# Altium PCB PCB1.pcbdoc
Units mil, origin at the board's own origin, x right, y up, seen from the top; angles counter-clockwise.
Board outline 5595 x 3600 mil, 2 copper layers (Top Layer, Bottom Layer); 17 components, 34 nets, 150 pads, 0 vias.
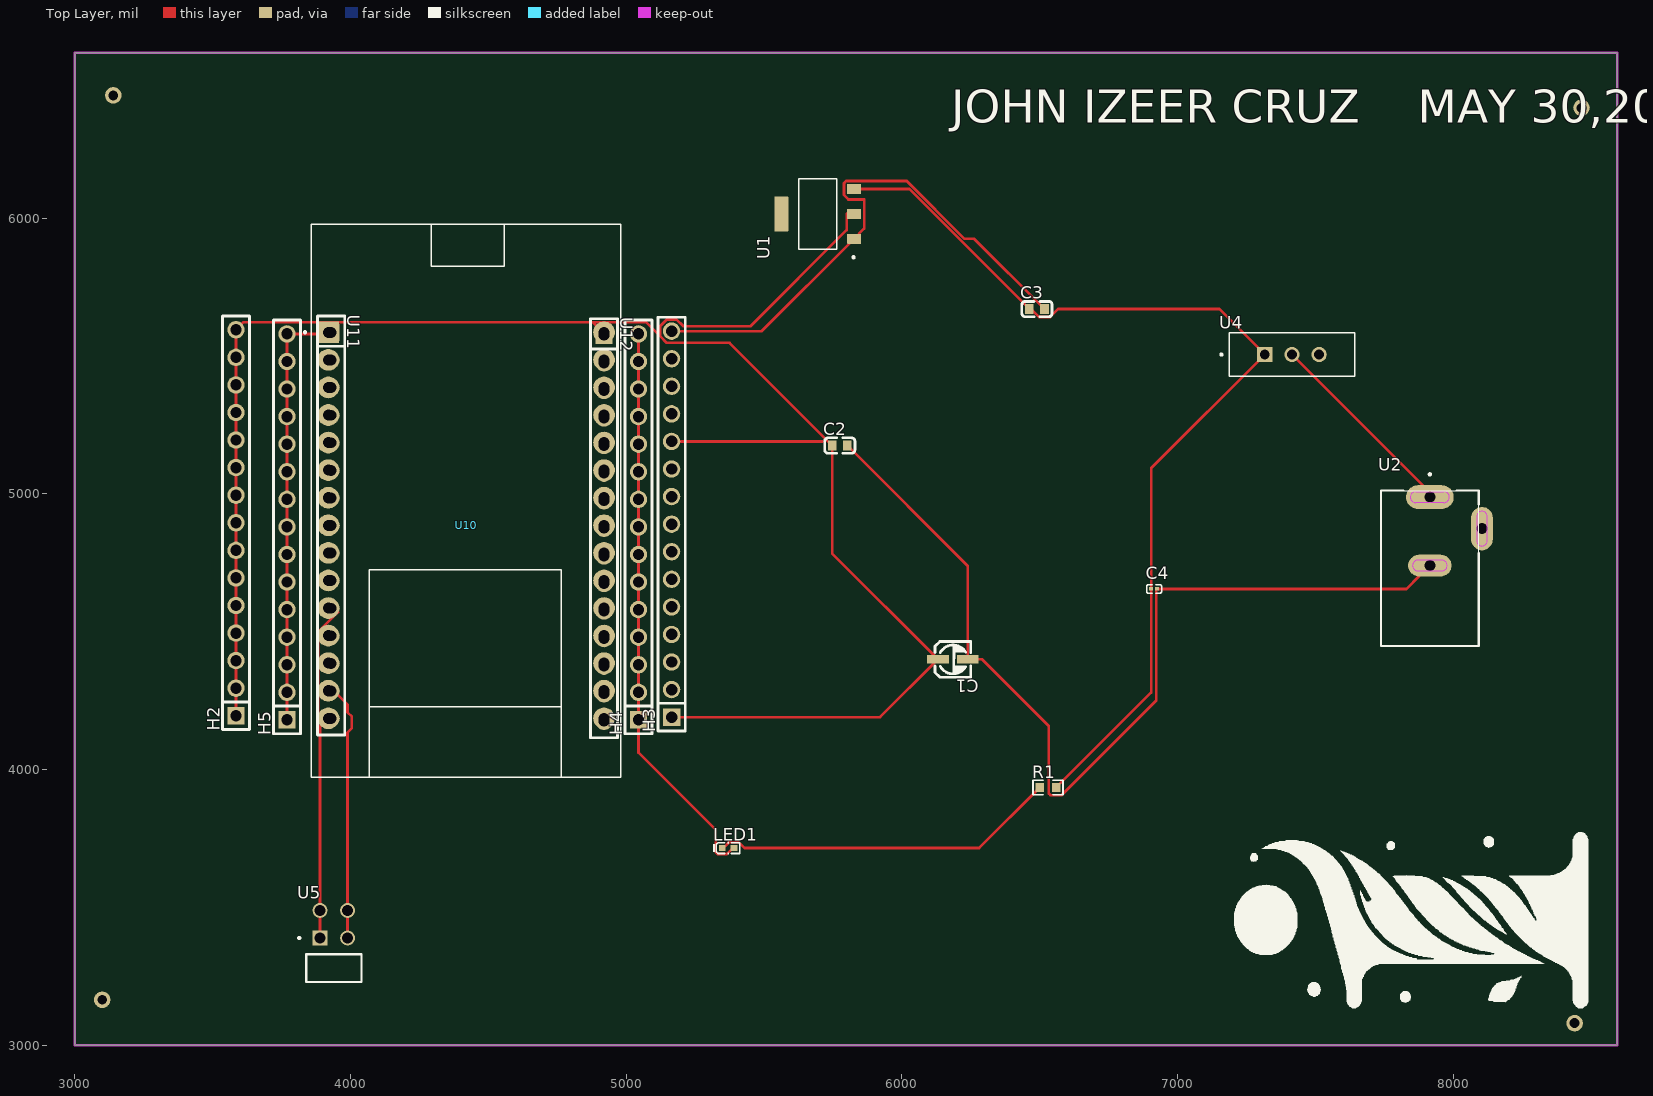
[diagram p0: Top Layer view]
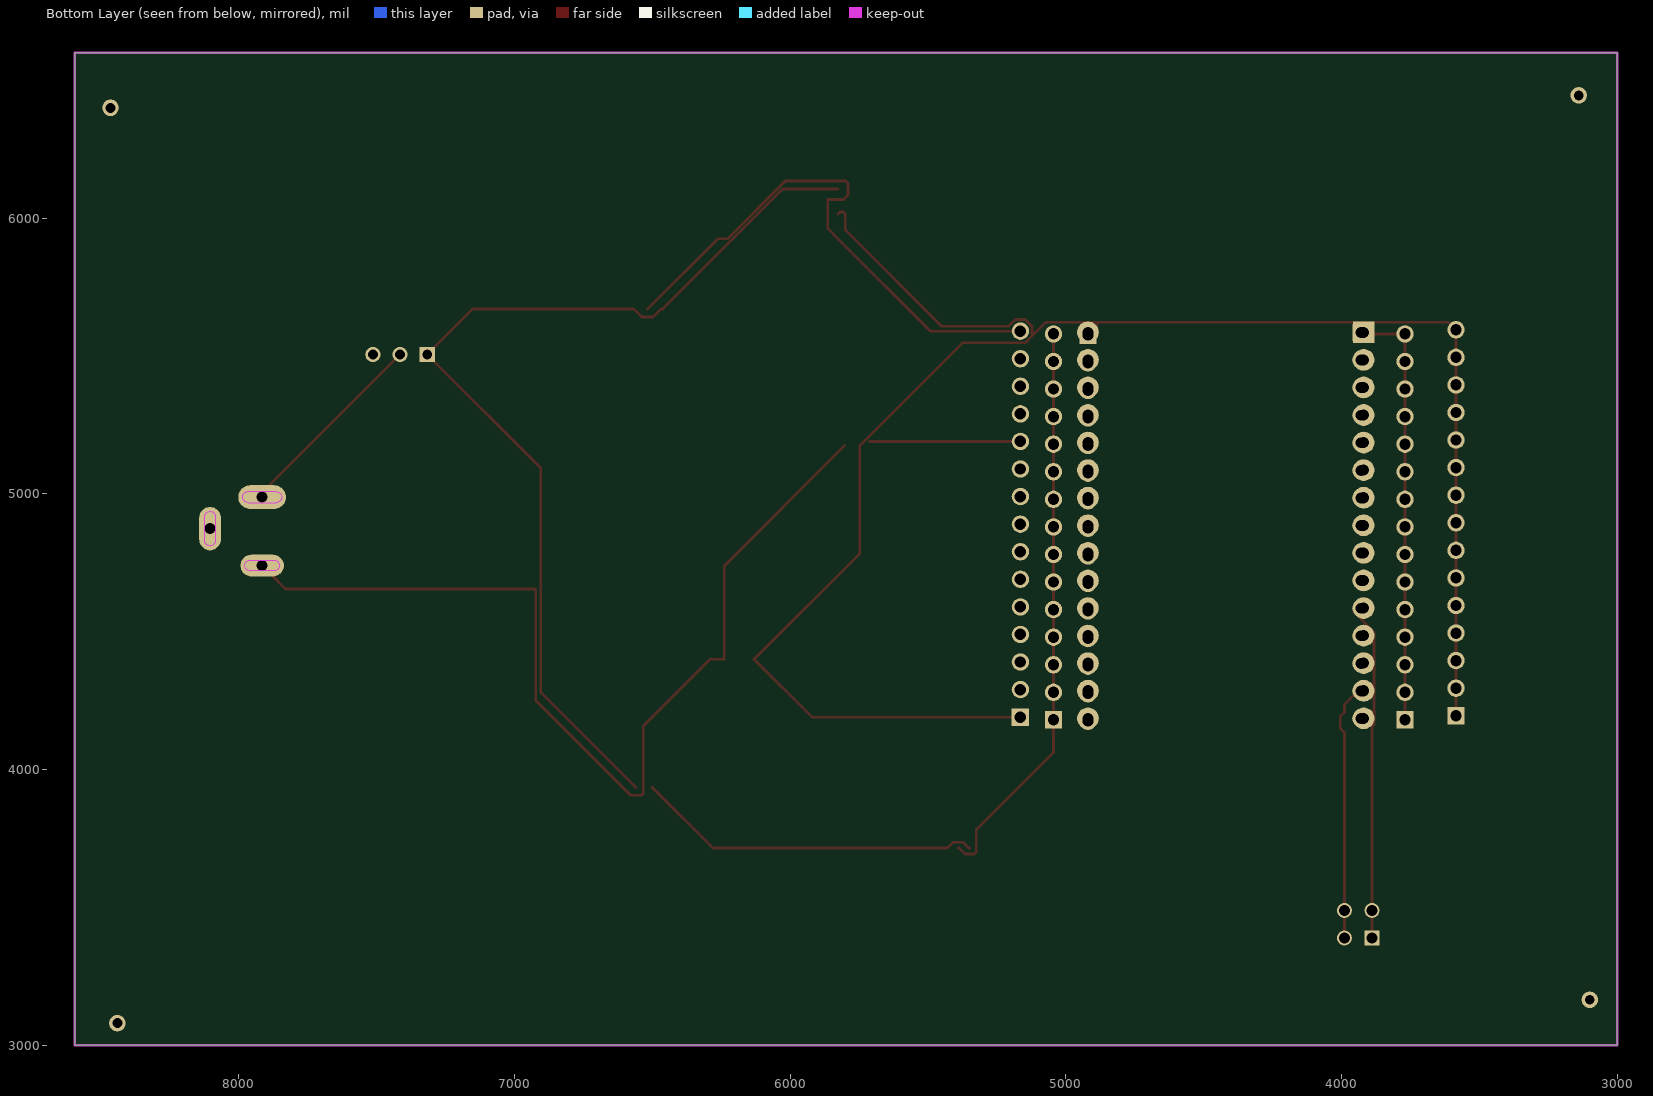
[diagram p1: Bottom Layer view, seen from below]

## Layer stack, top to bottom
Top Layer: signal copper (thickness not stored)
Dielectric: dielectric 12.6, FR-4, Dk 4.8
Bottom Layer: signal copper (thickness not stored)

## Board outline
3000,6600 8595,6600 8595,3000 3000,3000

## Design rules (kind name [scope] priority, off if disabled: settings)
BoardOutlineClearance copperThickness1oz [All] p0: genericclearance=10 ignorepadtopadclearanceinfootprint=FALSE except(0: Arc-SplitContinuation Track-SplitContinuation SMDPad-SplitContinuation THPad-SplitContinuation Via-SplitContinuation Fill-SplitContinuation Poly-SplitContinuation Region-SplitContinuation Text-SplitContinuation; 6: Track-CutoutEdge SMDPad-CutoutEdge THPad-CutoutEdge Via-CutoutEdge Region-CutoutEdge; 11.8: Track-OutlineEdge SMDPad-OutlineEdge THPad-OutlineEdge Via-OutlineEdge Fill-OutlineEdge Region-OutlineEdge Poly-OutlineEdge Text-OutlineEdge Fill-CutoutEdge)
BoardOutlineClearance copperThickness2oz [All] p0: genericclearance=10 ignorepadtopadclearanceinfootprint=FALSE except(0: Arc-SplitContinuation Track-SplitContinuation SMDPad-SplitContinuation THPad-SplitContinuation Via-SplitContinuation Fill-SplitContinuation Poly-SplitContinuation Region-SplitContinuation Text-SplitContinuation; 6: Track-CutoutEdge SMDPad-CutoutEdge THPad-CutoutEdge Via-CutoutEdge Region-CutoutEdge; 11.8: Track-OutlineEdge SMDPad-OutlineEdge THPad-OutlineEdge Via-OutlineEdge Fill-OutlineEdge Region-OutlineEdge Poly-OutlineEdge Text-OutlineEdge Fill-CutoutEdge)
Clearance copperThickness1oz [(InNet('+5V') OR InNet('GND') OR InNet('VCC') OR InNet('+3V3') OR InNet('$1N842') OR InNet('$1N851') OR InNet('D21') OR InNet('D22') OR InNet('3V3') OR InNet('D15') OR InNet('D2') OR InNet('D4') OR InNet('RX2') OR InNet('TX2') OR InNet('D5') OR InNet('D18') OR InNet('D19') OR InNet('RX0') OR InNet('TX0') OR InNet('D23') OR InNet('VIN') OR InNet('D13') OR InNet('D12') OR InNet('D14') OR InNet('D27') OR InNet('D26') OR InNet('D25') OR InNet('D33') OR InNet('D32') OR InNet('D35') OR InNet('D34') OR InNet('VN') OR InNet('VP') OR InNet('EN'))] p1: gap=7 ignorepadtopadclearanceinfootprint=FALSE except(4: Track-Track; 6: Track-SMDPad SMDPad-SMDPad Track-THPad SMDPad-THPad THPad-THPad Track-Via SMDPad-Via THPad-Via Via-Via SMDPad-Fill THPad-Fill Via-Fill Fill-Fill Track-Region SMDPad-Region THPad-Region Via-Region Region-Region Track-Poly SMDPad-Poly THPad-Poly Via-Poly Fill-Poly Region-Poly Poly-Poly Track-Text SMDPad-Text THPad-Text Via-Text Fill-Text Region-Text Poly-Text Text-Text; 6.9: Track-Hole SMDPad-Hole THPad-Hole Via-Hole Fill-Hole Region-Hole Poly-Hole Text-Hole Sheet-Hole; 11.8: Track-Fill Fill-Region Track-Sheet SMDPad-Sheet THPad-Sheet Via-Sheet Fill-Sheet Region-Sheet Poly-Sheet Text-Sheet)
Clearance copperThickness2oz [All] p1: gap=7 ignorepadtopadclearanceinfootprint=FALSE except(6: Track-SMDPad SMDPad-SMDPad Track-THPad SMDPad-THPad THPad-THPad Track-Via SMDPad-Via THPad-Via Via-Via SMDPad-Fill THPad-Fill Via-Fill Fill-Fill Track-Region SMDPad-Region THPad-Region Via-Region Region-Region Track-Poly SMDPad-Poly THPad-Poly Via-Poly Fill-Poly Region-Poly Poly-Poly Track-Text SMDPad-Text THPad-Text Via-Text Fill-Text Region-Text Poly-Text Text-Text; 6.9: Track-Hole SMDPad-Hole THPad-Hole Via-Hole Fill-Hole Region-Hole Poly-Hole Text-Hole Sheet-Hole; 8: Track-Track; 11.8: Track-Fill Fill-Region Track-Sheet SMDPad-Sheet THPad-Sheet Via-Sheet Fill-Sheet Region-Sheet Poly-Sheet Text-Sheet)
DiffPairsRouting differentialPair [All] p1: maxuncoupledlength=10 minlimit=6 maxlimit=6 mostfreqgap=6 toplayer_minwidth=5 toplayer_prefwidth=10 toplayer_maxwidth=100 bottomlayer_minwidth=5 bottomlayer_prefwidth=10 bottomlayer_maxwidth=100
PasteMaskExpansion pasteMaskExpansion [All] p1: expansion=0
PlaneConnect innerPlane [All] p1: planeconnectstyle=Relief reliefexpansion=20 reliefentries=4 reliefconductorwidth=10 reliefairgap=10
PolygonConnect copperRegion [All] p1: connectstyle=Relief reliefentries=4 reliefconductorwidth=10 polygonreliefangle="90 Angle" airgapwidth=10
RoutingVias viaSize [All] p1: viastyle="Through Hole" holewidth=12.0078 minholewidth=11.811 maxholewidth=248.0314 width=24.0158 minwidth=19.685 maxwidth=393.7008
SolderMaskExpansion solderMaskExpansion [All] p1: useseparateexpansions=TRUE expansion=2 expansionbottom=2
Width copperThickness1oz [All] p1: maxlimit=100 minlimit=5 preferedwidth=10
Width copperThickness2oz [All] p1: maxlimit=100 minlimit=8 preferedwidth=10

## Components (designator, comment, footprint, x,y, rotation, side; value= is the part's Value field where it differs from the comment)
C1 "C_Ele_SMD_3x5.4mm" CAP-SMD_BD3.0-L3.3-W3.3-RD 6185,4400 r180 top
C2 "CAP_0603" C0603 5775,5175 r0 top
C3 "CAP_0603" C0603 6490,5670 r0 top
C4 "CAP_0201" C0201 6915,4655 r0 top
H2 "2011-1X15G00SB" HDR-TH_15P-P2.54-V-M 3585,4895 r90 top
H3 "2011-1X15G00SB" HDR-TH_15P-P2.54-V-M 5165,4890 r90 top
H4 "2011-1X15G00SB" HDR-TH_15P-P2.54-V-M 5045,4880 r90 top
H5 "2011-1X15G00SB" HDR-TH_15P-P2.54-V-M 3770,4880 r90 top
LED1 "LED_0402-R" LED0402-RD_YELLOW 5370,3715 r0 top
R1 "Res_0603" R0603 6530,3935 r0 top
U1 "AMS1117-5.0" SOT229P700X180-4N 5695,6015 r90 top
U2 "DCJ200-10-A-XX-K_REVA" GCT_DCJ200-10-A-XX-K_REVA 7915,4730 r0 top
U4 "MINI-SPDT-SW" SW_MINI-SPDT-SW 7415,5505 r0 top
U5 "MTSW-102-10-L-D-472-RA" SAMTEC_MTSW-102-10-L-D-472-RA 3940,3280 r0 top
U10 "ESP32-DEVKIT-V1" MODULE_ESP32_DEVKIT_V1 4420,4975 r0 top
U11 "HX PM2.54-1x15P ZC" HDR-TH_15P-P2.54-V-F-1 3930,4885 r270 top
U12 "HX PM2.54-1x15P ZC" HDR-TH_15P-P2.54-V-F-1 4920,4875 r270 top

## Footprints (in the part's own frame and the unit in brackets; to place one, negate y for a bottom-side part, rotate by r counter-clockwise, add the part's x,y. Pads: shape width x height; smd on the part's side, far side on the other; paste and mask are expansions set on the pad)
C0201 [mil]
  rect 14.51x12.76 smd: 1(-10.8,0) 2(10.8,0)
  silkscreen extent -27,-15 27,15
C0603 [mm]
  rect 0.8x0.9 smd: 1(-0.7,0) 2(0.7,0)
  silkscreen extent -1.39,-0.71 1.39,0.71
CAP-SMD_BD3.0-L3.3-W3.3-RD [mm]
  rect 2x0.8 smd: 1(1.37,0) 2(-1.37,0)
  silkscreen extent -1.65,-1.64 1.65,1.66
GCT_DCJ200-10-A-XX-K_REVA [mm]
  oval 4.4x2.2 hole 1: 1(0,6.55)
  oval 4x2 hole 1: 2(0,0.25)
  oval 2x4 hole 1: 3(4.8,3.65)
  Board Outline Layer lines w0.003: -1.8,6.55 cw(c-1.3,6.55) -1.3,7.05 ; -1.8,6.55 cw(c-1.3,6.55) -1.3,7.05 ; -1.8,6.55 ccw(c-1.3,6.55) -1.3,6.05 ; -1.8,6.55 ccw(c-1.3,6.55) -1.3,6.05 ; -1.6,0.25 cw(c-1.1,0.25) -1.1,0.75 ; -1.6,0.25 cw(c-1.1,0.25) -1.1,0.75 ; -1.6,0.25 ccw(c-1.1,0.25) -1.1,-0.25 ; -1.6,0.25 ccw(c-1.1,0.25) -1.1,-0.25 ; -1.3,6.05 1.3,6.05 ; -1.3,6.05 1.3,6.05 ; -1.3,7.05 1.3,7.05 ; -1.3,7.05 1.3,7.05 ; -1.1,-0.25 1.1,-0.25 ; -1.1,-0.25 1.1,-0.25 ; -1.1,0.75 1.1,0.75 ; -1.1,0.75 1.1,0.75 ; 1.1,-0.25 ccw(c1.1,0.25) 1.6,0.25 ; 1.1,-0.25 ccw(c1.1,0.25) 1.6,0.25 ; 1.1,0.75 cw(c1.1,0.25) 1.6,0.25 ; 1.1,0.75 cw(c1.1,0.25) 1.6,0.25 ; 1.3,6.05 ccw(c1.3,6.55) 1.8,6.55 ; 1.3,6.05 ccw(c1.3,6.55) 1.8,6.55 ; 1.3,7.05 cw(c1.3,6.55) 1.8,6.55 ; 1.3,7.05 cw(c1.3,6.55) 1.8,6.55 ; 4.3,2.55 ccw(c4.8,2.55) 4.8,2.05 ; 4.3,2.55 ccw(c4.8,2.55) 4.8,2.05 ; 4.3,2.55 4.3,4.75 ; 4.3,2.55 4.3,4.75 ; 4.3,4.75 cw(c4.8,4.75) 4.8,5.25 ; 4.3,4.75 cw(c4.8,4.75) 4.8,5.25 ; 4.8,2.05 ccw(c4.8,2.55) 5.3,2.55 ; 4.8,2.05 ccw(c4.8,2.55) 5.3,2.55 ; 4.8,5.25 cw(c4.8,4.75) 5.3,4.75 ; 4.8,5.25 cw(c4.8,4.75) 5.3,4.75 ; 5.3,2.55 5.3,4.75 ; 5.3,2.55 5.3,4.75
  silkscreen extent -4.5,-7.15 4.5,8.75
HDR-TH_15P-P2.54-V-F-1 [mm]
  rect 1.6x1.575 hole 1: 1(-17.78,0)
  round 1.6 hole 1: 2(-15.24,0) 3(-12.7,0) 4(-10.16,0) 5(-7.62,0) 6(-5.08,0) 7(-2.54,0) 8(0,0) 9(2.54,0) 10(5.08,0) 11(7.62,0) 12(10.16,0) 13(12.7,0) 14(15.24,0) 15(17.78,0)
  silkscreen extent -19.3,-1.25 19.3,1.25
HDR-TH_15P-P2.54-V-M [mm]
  rect 1.6x1.6 hole 1.05: 1(-17.78,0)
  round 1.6 hole 1.05: 2(-15.24,0) 3(-12.7,0) 4(-10.16,0) 5(-7.62,0) 6(-5.08,0) 7(-2.54,0) 8(0,0) 9(2.54,0) 10(5.08,0) 11(7.62,0) 12(10.16,0) 13(12.7,0) 14(15.24,0) 15(17.78,0)
  silkscreen extent -19.05,-1.25 19.05,1.25
LED0402-RD_YELLOW [mm]
  rect 0.636x0.54 smd: 1(-0.538,0) 2(0.538,0)
  silkscreen extent -1.39,-0.54 1.09,0.54
MODULE_ESP32_DEVKIT_V1 [mm]
  rect 2x2 hole 1.02: 1(-12.7,15.515)
  round 2 hole 1.02: 2(-12.7,12.975) 3(-12.7,10.435) 4(-12.7,7.895) 5(-12.7,5.355) 6(-12.7,2.815) 7(-12.7,0.275) 8(-12.7,-2.265) 9(-12.7,-4.805) 10(-12.7,-7.345) 11(-12.7,-9.885) 12(-12.7,-12.425) 13(-12.7,-14.965) 14(-12.7,-17.505) 15(-12.7,-20.045) 16(12.7,-20.045) 17(12.7,-17.505) 18(12.7,-14.965) 19(12.7,-12.425) 20(12.7,-9.885) 21(12.7,-7.345) 22(12.7,-4.805) 23(12.7,-2.265) 24(12.7,0.275) 25(12.7,2.815) 26(12.7,5.355) 27(12.7,7.895) 28(12.7,10.435) 29(12.7,12.975) 30(12.7,15.515)
  silkscreen extent -14.95,-25.48 14.23,25.48
R0603 [mil]
  rect 31.75x34.02 smd: 1(-29.66,0) 2(29.66,0)
  silkscreen extent -55,-26 55,26
SAMTEC_MTSW-102-10-L-D-472-RA [mm]
  rect 1.37x1.37 hole 1.02: 01(-1.27,2.77)
  round 1.37 hole 1.02: 02(-1.27,5.31) 03(1.27,2.77) 04(1.27,5.31)
  silkscreen extent -3.29,-1.27 2.54,2.87
SOT229P700X180-4N [mm]
  rrect15% 0.93x1.31 smd: 1(-2.29,-3.345) 2(0,-3.345) 3(2.29,-3.345)
  rrect15% 3.24x1.31 smd: 4(0,3.345)
  silkscreen extent -4.09,-3.4 3.25,1.75
SW_MINI-SPDT-SW [mm]
  rect 1.408x1.408 hole 0.9: 1(-2.5,0)
  round 1.408 hole 0.9: 2(0,0) 3(2.5,0)
  silkscreen extent -6.6,-2 5.8,2

## Free pads (board coordinates)
  round 60 hole 36: 1(3140,6445) 2(3100,3165) 3(8440,3080) 4(8465,6400)

## Nets (pads, with @x,y where several pads share a name; then routed paths per layer and width w, separated by ;. In a path a pad name is that pad's centre, name@x,y a point inside that pad or via, vN(x,y) a via of type N, cw(c..) or ccw(c..) an arc to the next point about the centre after c; other vN are vias at no path point)
3V3: U10.1
$1N842: LED1.1 R1.1 | length 1260.6
  Top Layer w10: LED1.1 5352.5,3715 5374.11,3736.61 5408.27,3736.61 5429.88,3715 6280.34,3715 R1.1
$1N851: U2.1 U4.2 | length 679.7
  Top Layer w10: U4.2 U2.1@7895.63,5024.37
+3V3: H5.1 H5.2 H5.3 H5.4 H5.5 H5.6 H5.7 H5.8 H5.9 H5.10 H5.11 H5.12 H5.13 H5.14 H5.15 U11.1 | length 1534.6
  Top Layer w10: H5.1 H5.2 H5.3 H5.4 H5.5 H5.6 H5.7 H5.8 H5.9 H5.10 H5.11 H5.12 H5.13 H5.14 H5.15 U11.1@3904.65,5580
+5V: C1.1 C2.1 H2.1 H2.2 H2.3 H2.4 H2.5 H2.6 H2.7 H2.8 H2.9 H2.10 H2.11 H2.12 H2.13 H2.14 H2.15 H3.1 U1.2 U12.1 | length 6756.1
  Top Layer w10: H2.1 H2.2 H2.3 H2.4 H2.5 H2.6 H2.7 H2.8 H2.9 H2.10 H2.11 H2.12 H2.13 H2.14 H2.15 3612.48,5622.48 4877.52,5622.48 ; U12.1@4906.48,5593.52 4877.52,5622.48 ; H3.1 5921.06,4190 C1.1 5747.44,4783.62 C2.1 5374.92,5547.52 5147.4,5547.52 5122.52,5572.4 ; U1.2 5819.62,6022.07 5807.07,6022.07 5800,6015 5800,5956.17 5451.43,5607.6 5207.48,5607.6 5182.6,5632.48 5147.4,5632.48 5122.52,5607.6 5122.52,5572.4 ; 4877.52,5622.48 5072.44,5622.48 5122.52,5572.4
D2: U10.4 U11.4
D4: U10.5 U11.5
D5: U10.8 U11.8
D12: U10.27 U12.4
D13: U10.28 U12.3
D14: U10.26 U12.5
D15: U10.3 U11.3
D18: U10.9 U11.9
D19: U10.10 U11.10
D21: U5.01 U5.02 U10.11 U11.11 | length 1214.9
  Top Layer w10: U5.01 U5.02 3890,4154.92 3882.52,4162.4 3882.52,4497.6 3890,4505.08 3890,4505.83 U10.11@3955,4570.83
D22: U5.03 U5.04 U10.14 U11.14 | length 909
  Top Layer w10: U10.14@3955,4270.83 3990,4235.83 3990,4207.04 4005.35,4191.68 4005.35,4149.97 3990,4134.61 U5.04 U5.03
D23: U10.15 U11.15
D25: U10.23 U12.8
D26: U10.24 U12.7
D27: U10.25 U12.6
D32: U10.21 U12.10
D33: U10.22 U12.9
D34: U10.19 U12.12
D35: U10.20 U12.11
EN: U10.16 U12.15
GND: C1.2 C2.2 C3.2 C4.2 H3.2 H3.3 H3.4 H3.5 H3.6 H3.7 H3.8 H3.9 H3.10 H3.11 H3.12 H3.13 H3.14 H3.15 H4.1 H4.2 H4.3 H4.4 H4.5 H4.6 H4.7 H4.8 H4.9 H4.10 H4.11 H4.12 H4.13 H4.14 H4.15 LED1.2 U1.1 U2.2 U11.2 U12.2 | length 8133.9
  Top Layer w10: H4.15 H4.14 H4.13 H4.12 H4.11 H4.10 H4.9 H4.8 H4.7 H4.6 H4.5 H4.4 H4.3 H4.2 H4.1 5045,4061.19 5325.3,3780.89 5325.3,3699.82 5331.73,3693.39 5365.89,3693.39 5387.5,3715 LED1.2 ; H3.11 5712.62,5190 ; H3.15 5491.85,5590 U1.1 5863.46,5961.61 5863.46,6067.82 5806.01,6067.82 5789.92,6083.91 5789.92,6126.41 5797.96,6134.45 6017.81,6134.45 6227.42,5924.84 6262.72,5924.84 C3.2 ; C2.2 6238.94,4738.62 C1.2 6290.07,4400 6532.8,4157.27 6532.8,3913.44 6539.23,3907.01 6580.09,3907.01 6922.44,4249.36 6922.44,4651.64 C4.2 7830.16,4655 U2.2@7878.5,4703.35
RX0: U10.12 U11.12
RX2: U10.6 U11.6
TX0: U10.13 U11.13
TX2: U10.7 U11.7
VCC: C3.1 C4.1 R1.2 U1.3 U4.1 | length 3645.8
  Top Layer w10: U1.3 6027.28,6105.16 C3.1 6468.56,5670 6497.26,5641.3 6537.86,5641.3 6566.56,5670 7151.57,5670 U4.1 6904.2,5092.63 C4.1 6904.2,4279.54 R1.2
VIN: U10.30
VN: U10.18 U12.13
VP: U10.17 U12.14
pads on no net: U1.4 U2.3 U4.3 U10.2 U10.29

## Keep-outs
Board Outline Layer:
  the board outline again, w10

## Silkscreen, mask and mechanical layers (free items; w line width, h text height)
Top Silkscreen Layer:
  drawing of 10 lines, arcs and shapes, not listed
  text "JOHN IZEER CRUZ    MAY 30,2025" at 6180,6345 h120